# Altium PCB IOT_Masterv1.PcbDoc
Units mm, origin at the board's own origin, x right, y up, seen from the top; angles counter-clockwise.
Board outline 100 x 90 mm, 2 copper layers (Top Layer, Bottom Layer); 80 components, 84 nets, 354 pads, 50 vias.
Unrouted connection lines stored in the file: 2.
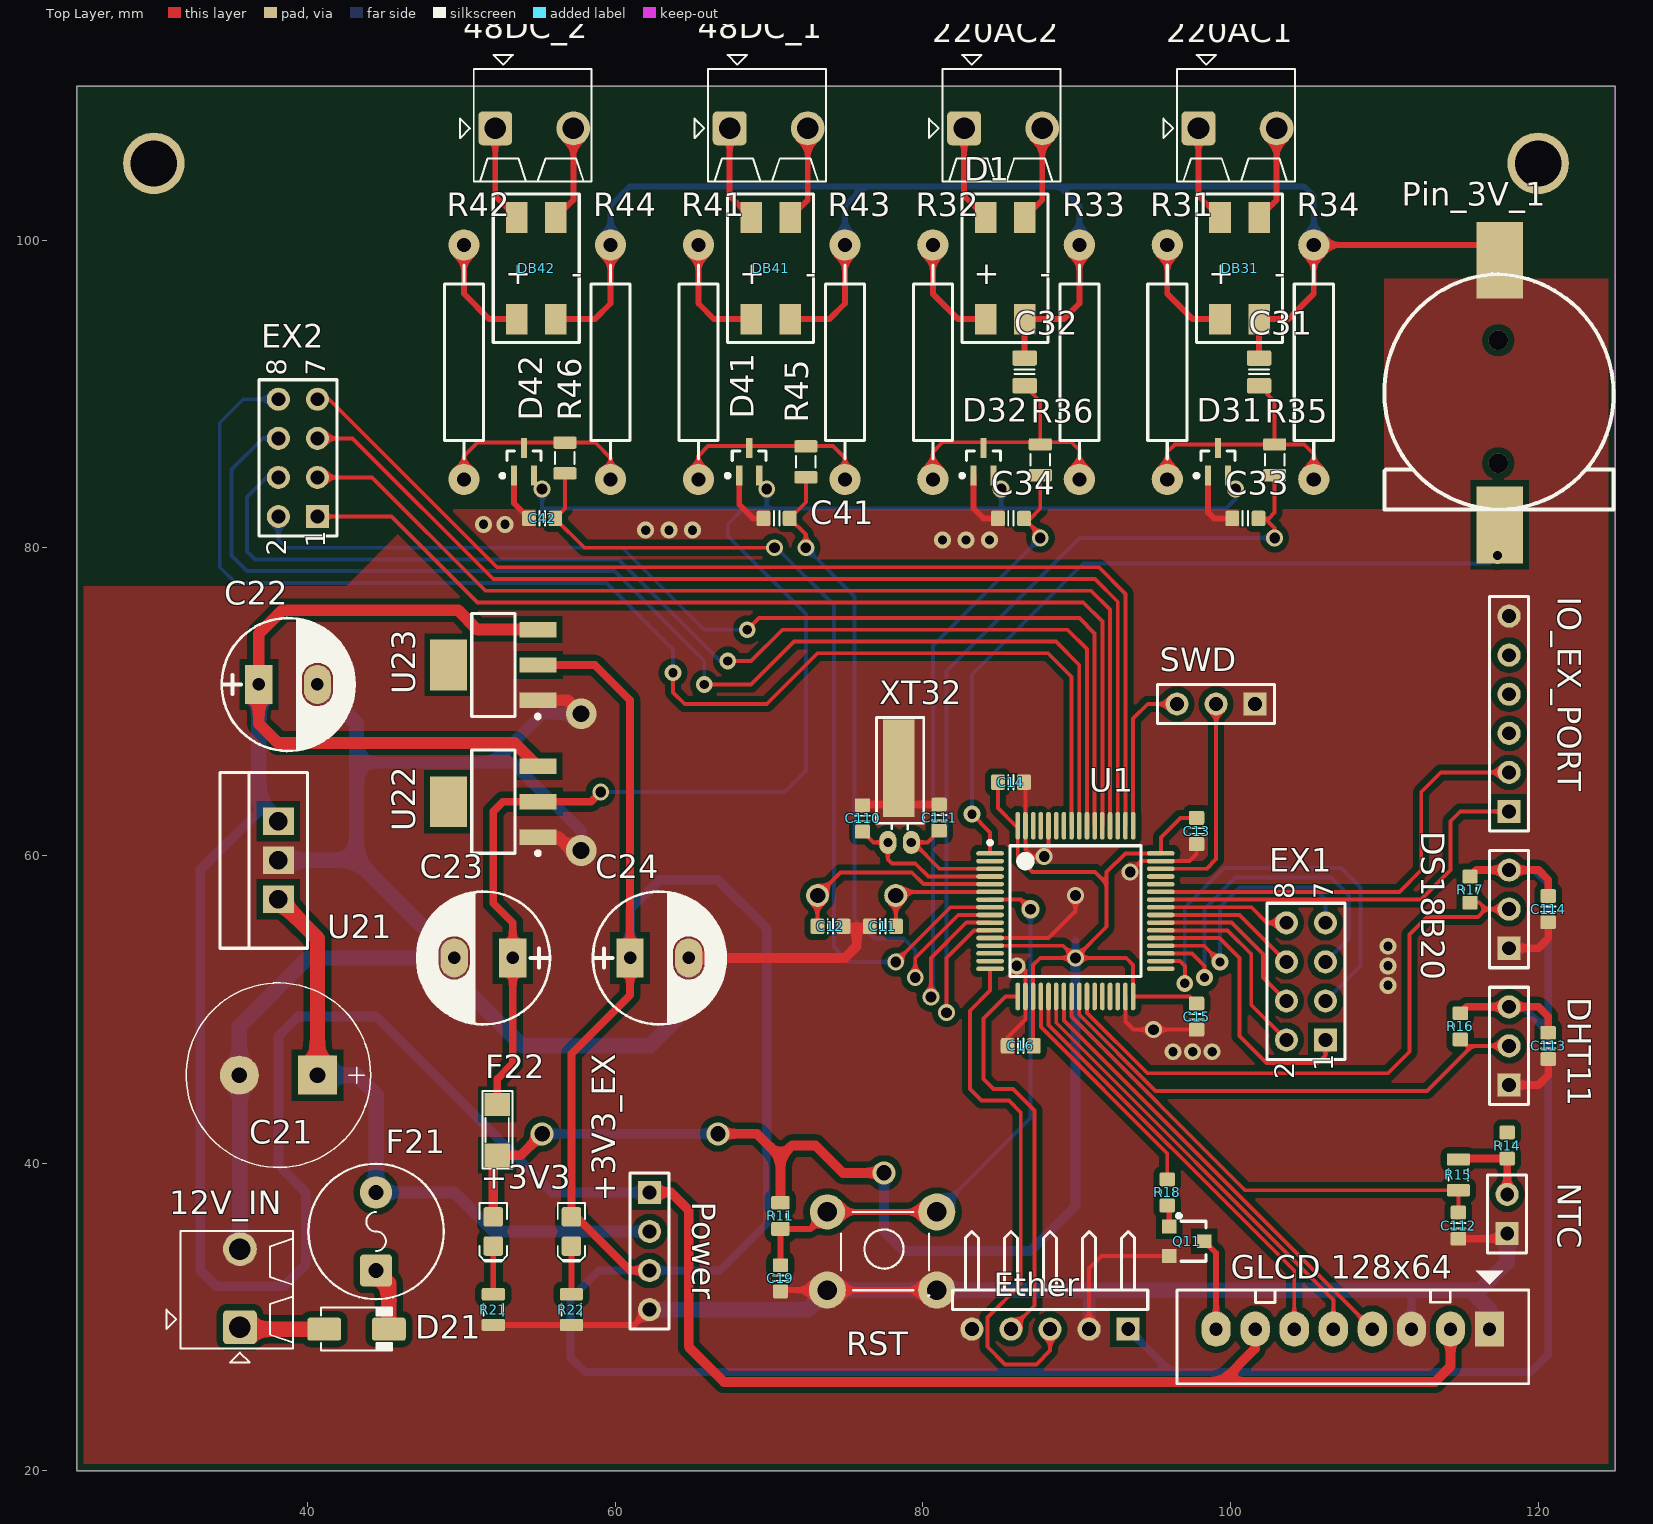
[diagram p0: Top Layer view]
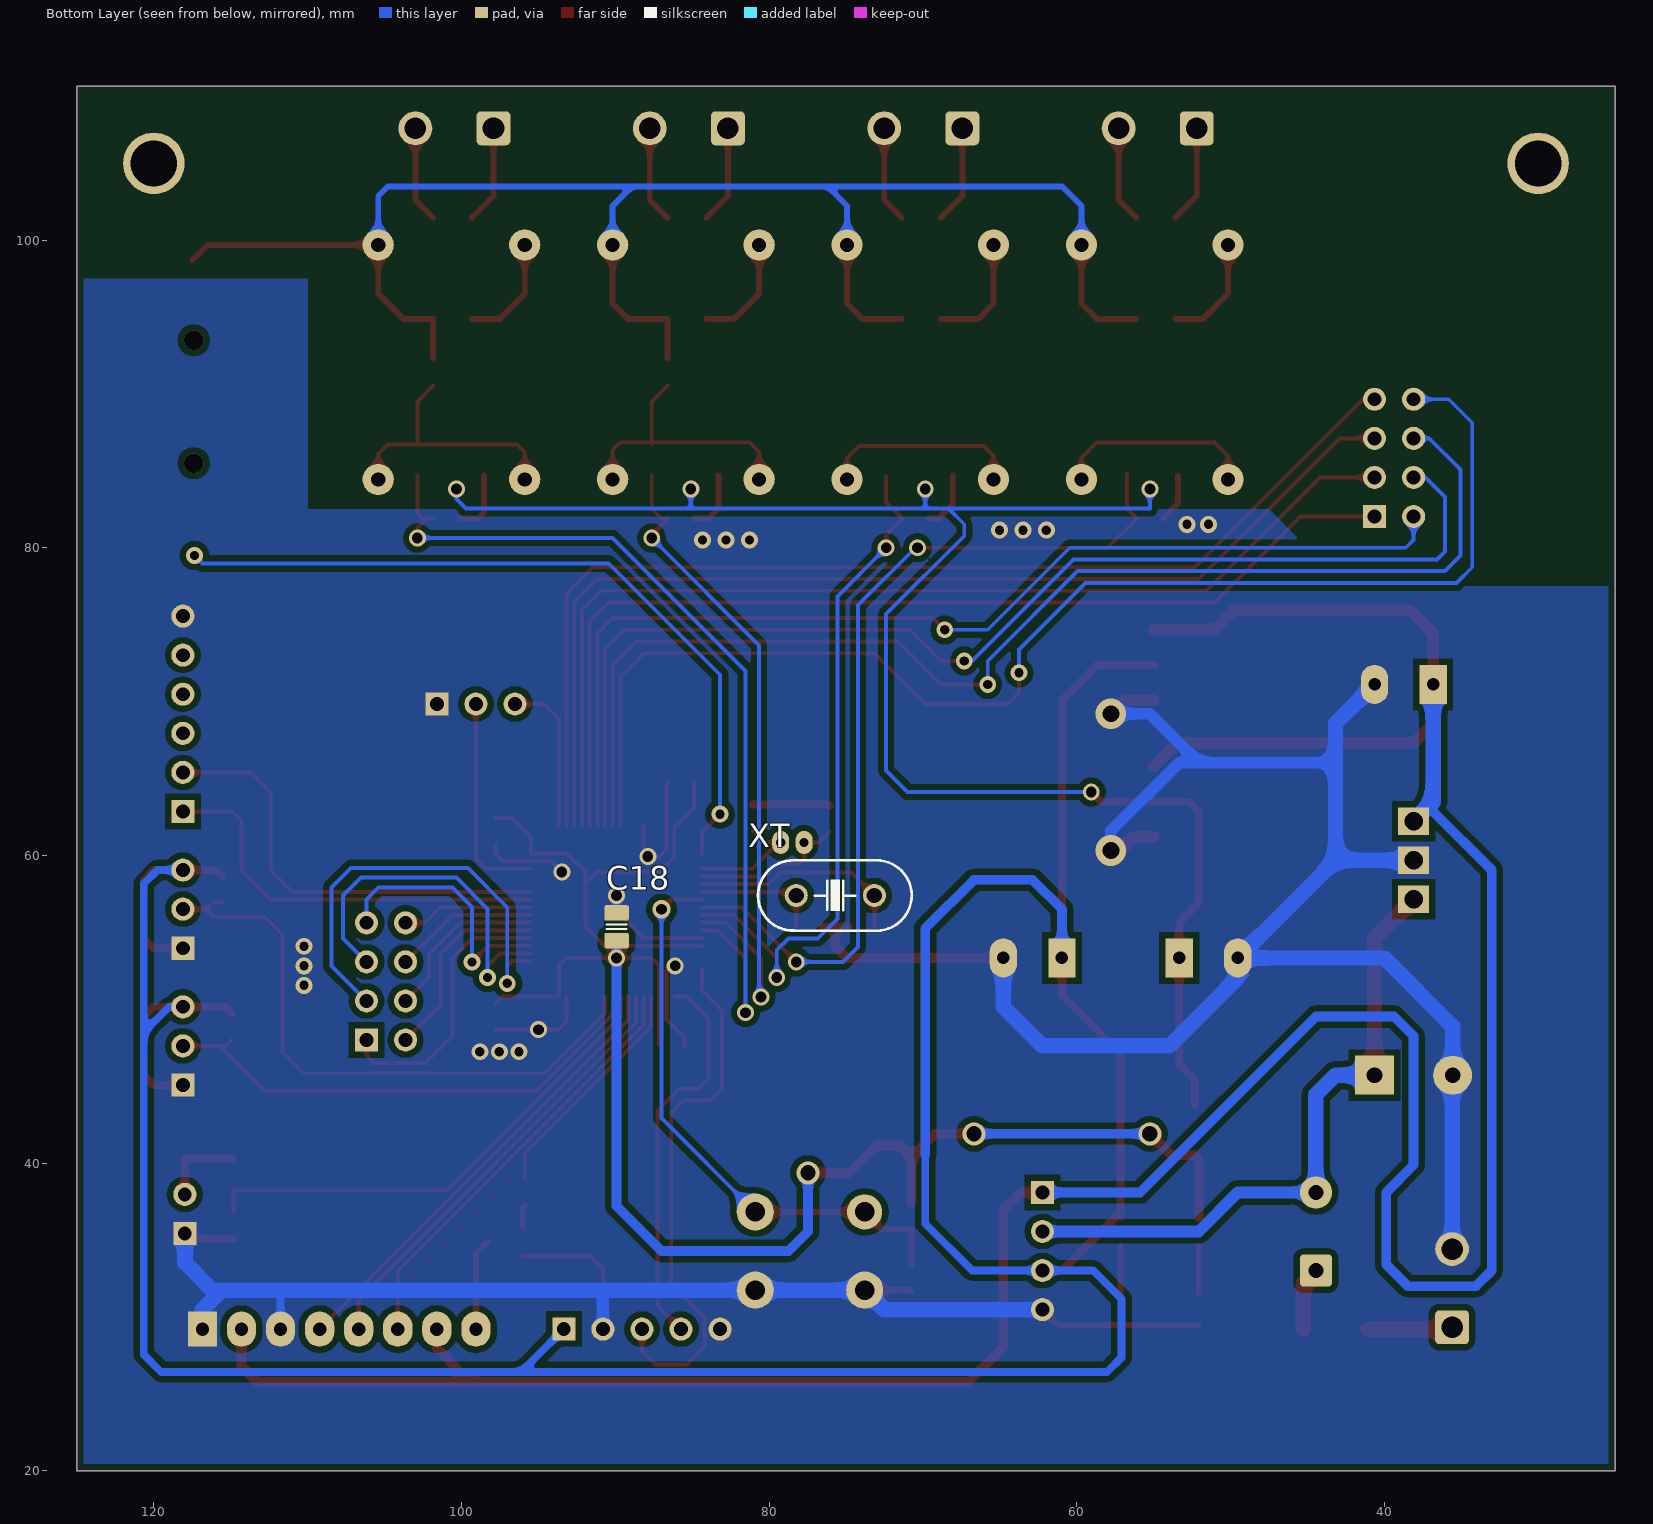
[diagram p1: Bottom Layer view, seen from below]
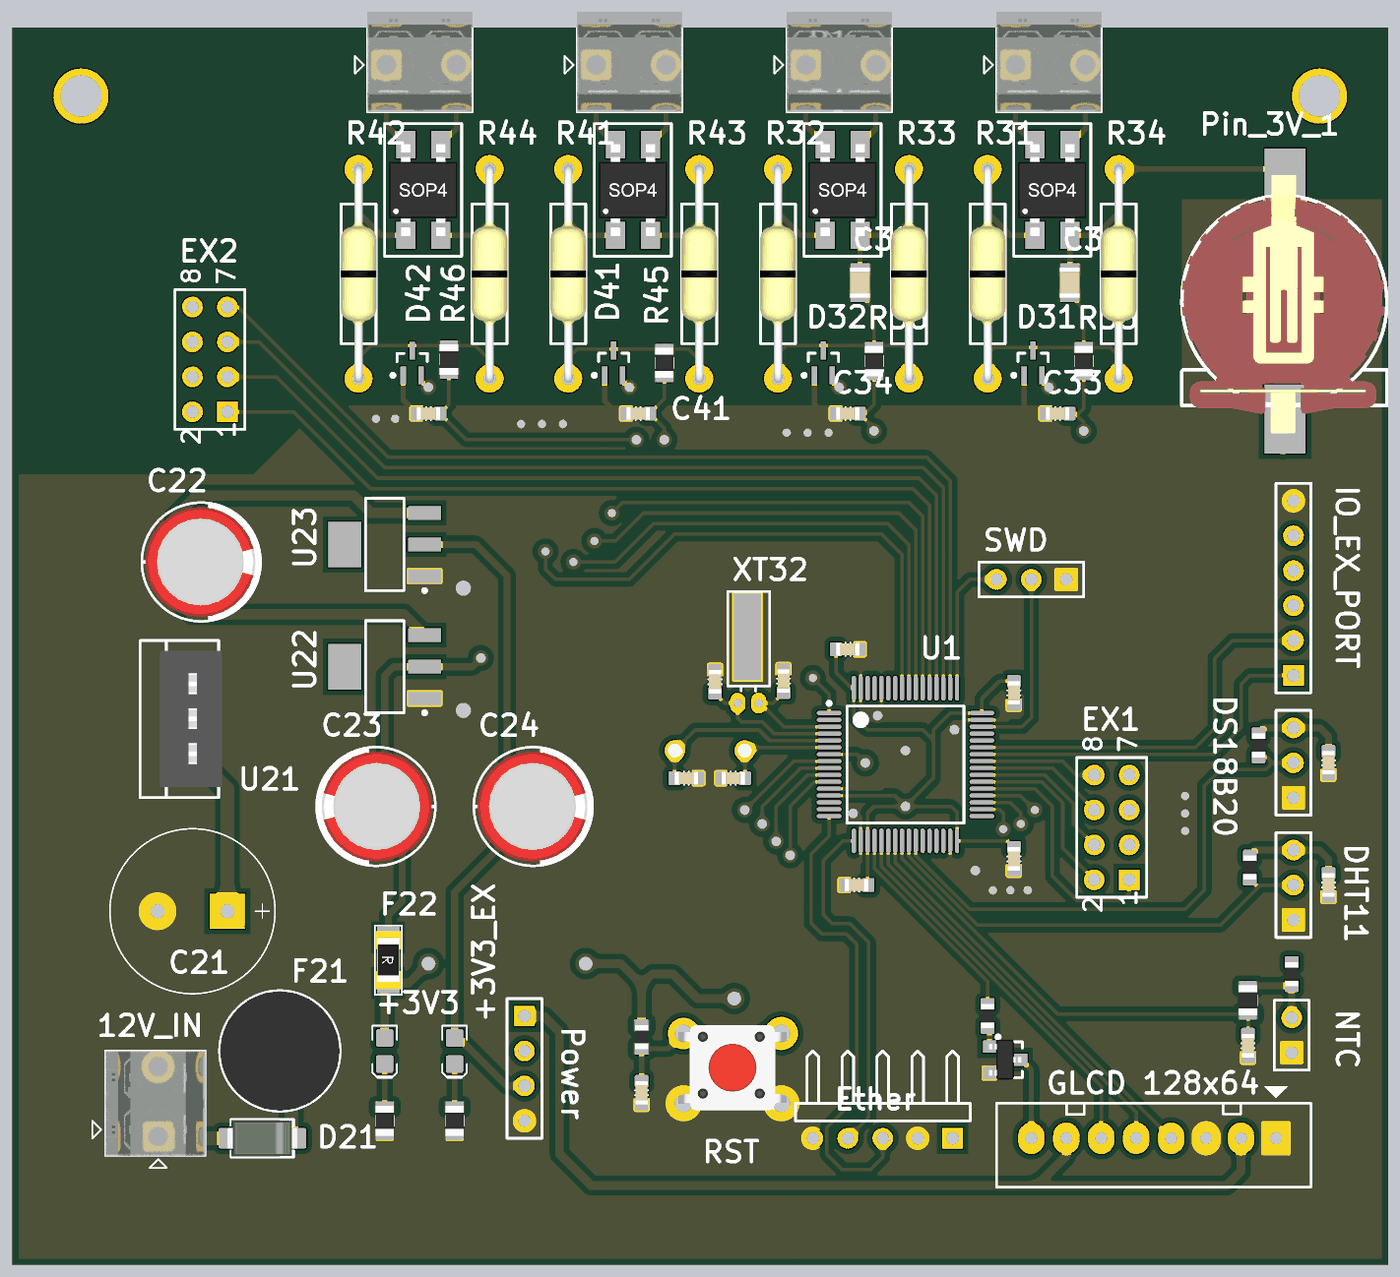
[diagram p2: 3D render of the assembled board from above, using the file's embedded part models]

## Layer stack, top to bottom
Top Solder: solder mask 0.0102, Solder Resist, Dk 3.5
Top Layer: signal copper 0.0356
Dielectric 1: dielectric 0.32, FR-4, Dk 4.8
Bottom Layer: signal copper 0.0356
Bottom Solder: solder mask 0.0102, Solder Resist, Dk 3.5

## Board outline
25,20 125,20 125,110 25,110

## Design rules (kind name [scope] priority, off if disabled: settings)
Clearance [All] p1: gap=0.4
PlaneConnect [All] p1: planeconnectstyle=Direct reliefexpansion=0.508 reliefentries=4 reliefconductorwidth=0.254 reliefairgap=0.254
PolygonConnect [All] p1: connectstyle=Direct reliefconductorwidth=0.254 reliefentries=4 polygonreliefangle="90 Angle" airgapwidth=0.254
RoutingVias [All] p1: holewidth=0.711 width=1.27 viastyle="Through Hole" minholewidth=0.6 minwidth=1.1 maxholewidth=5 maxwidth=5
SolderMaskExpansion [All] p1: expansion=0.102
Width [All] p1: maxlimit=5 minlimit=0.254 preferedwidth=0.254
29 further rules are at their usual default settings.

## Components (designator, comment, footprint, x,y, rotation, side; value= is the part's Value field where it differs from the comment)
12V_IN "Stackable ScrewTerm" 2P_PCB_ScrewTerm_200mil 31.75,27.94 r0 top
48DC_1 "Stackable ScrewTerm" 2P_PCB_ScrewTerm_200mil 66.04,111.125 r270 top
48DC_2 "Stackable ScrewTerm" 2P_PCB_ScrewTerm_200mil 50.8,111.125 r270 top
220AC1 "Stackable ScrewTerm" 2P_PCB_ScrewTerm_200mil 96.52,111.125 r270 top
220AC2 "Stackable ScrewTerm" 2P_PCB_ScrewTerm_200mil 81.28,111.125 r270 top
+3V3 "Blue" LED-0805-K 52.07,35.56 r270 top
+3V3_EX "Blue" LED-0805-K 57.15,35.56 r270 top
C11 "Cap_22p_0603" CAPC1608N 77.394,55.397 r180 top
C12 "Cap_22p_0603" CAPC1608N 73.99,55.397 r0 top
C13 "Cap_104_0603" CAPC1608N 97.79,61.595 r90 top
C14 "Cap_104_0603" CAPC1608N 85.725,64.77 r180 top
C15 "Cap_104_0603" CAPC1608N 97.79,49.53 r90 top
C16 "Cap_104_0603" CAPC1608N 86.36,47.625 r0 top
C18 "Cap_10uF_0805" CAPC2012N_F#1 89.916,55.372 r270 bottom
C19 "Cap_104_0603" CAPC1608N 70.739,32.512 r90 top
C21 "2200uF/35V" CP_1000uF_25V 38.1,45.72 r180 top
C22 "330uF/25V" CP1.5/3.4 36.83,71.12 r0 top
C23 "330uF/25V" CP1.5/3.4 53.34,53.34 r180 top
C24 "330uF/25V" CP1.5/3.4 60.96,53.34 r0 top
C31 "CAP NP" CAPC2012N_F#2 101.854,91.44 r270 top
C32 "CAP NP" CAPC2012N_F#2 86.614,91.44 r270 top
C33 "CAP NP" CAPC1608N 100.965,81.915 r0 top
C34 "CAP NP" CAPC1608N 85.725,81.915 r0 top
C41 "CAP NP" CAPC1608N 70.485,81.915 r0 top
C42 "CAP NP" CAPC1608N 55.245,81.915 r0 top
C110 "Cap_22p_0603" CAPC1608N 76.073,62.408 r90 top
C111 "Cap_22p_0603" CAPC1608N 81.051,62.459 r90 top
C112 "CAP NP" CAPC1608N 114.808,35.941 r90 top
C113 "CAP NP" CAPC1608N 120.65,47.625 r90 top
C114 "CAP NP" CAPC1608N 120.65,56.515 r90 top
D1 "Bridge" MB6S 82.55,93.345 r0 top
D21 "Diode" DO-214AC 43.18,29.21 r0 top
D31 "BAV99" SOT323 97.79,83.82 r90 top
D32 "BAV99" SOT323 82.55,83.82 r90 top
D41 "BAV99" SOT323 67.31,83.82 r90 top
D42 "BAV99" SOT323 52.665,83.813 r90 top
DB31 "Bridge" MB6S 97.79,93.345 r0 top
DB41 "Bridge" MB6S 67.31,93.345 r0 top
DB42 "Bridge" MB6S 52.07,93.345 r0 top
DHT11 "Header 3" HDR1X3 118.11,45.085 r90 top
DS18B20 "Header 3" HDR1X3 118.11,53.975 r90 top
Ether "EX_CON" HDR1X5H 93.345,29.21 r180 top
EX1 "Header 4X2" HDR2X4 106.172,48.006 r90 top
EX2 "Header 4X2" HDR2X4 40.64,82.042 r90 top
F21 "1.5A" FUSE_SR-5-BK 44.45,35.56 r90 top
F22 "fuse_200mA_1206" "SMD 1206" 52.324,42.164 r270 top
"GLCD 128x64" "JP8" CON8 116.84,29.21 r180 top
IO_EX_PORT "Header 6" HDR1X6 118.11,62.865 r90 top
NTC "NTC_10K" HDR1X2 117.983,35.433 r90 top
Pin_3V_1 "3V" CR1220 110,82.5 r0 top
Power "Header 4" HDR1X4 62.23,38.1 r270 top
Q11 "C828" "SOT23 TOP" 97.155,34.925 r270 top
R11 "Res_10k_0603" RESC1608N_F 70.739,36.576 r90 top
R14 "Res" RESC1608N_ZERO 117.983,41.148 r90 top
R15 "Res" RESC2012N_F 114.808,39.243 r270 top
R16 "Res" RESC1608N_ZERO 114.935,48.895 r90 top
R17 "Res" RESC1608N_ZERO 115.57,57.785 r90 top
R18 "Res" RESC1608N_ZERO 95.885,38.1 r270 top
R21 "Res_0805_1k" RESC2012N_F 52.07,30.48 r270 top
R22 "Res_0805_1k" RESC2012N_F 57.15,30.48 r270 top
R31 "Res" RESTH_0.0R_AXIAL-0.6 95.885,92.075 r270 top
R32 "Res" RESTH_0.0R_AXIAL-0.6 80.645,92.075 r270 top
R33 "Res" RESTH_0.0R_AXIAL-0.6 90.17,92.075 r270 top
R34 "Res" RESTH_0.0R_AXIAL-0.6 105.41,92.075 r270 top
R35 "Res" RESC2012N_F 102.87,85.725 r270 top
R36 "Res" RESC2012N_F 87.63,85.725 r270 top
R41 "Res" RESTH_0.0R_AXIAL-0.6 65.405,92.075 r270 top
R42 "Res" RESTH_0.0R_AXIAL-0.6 50.165,92.075 r270 top
R43 "Res" RESTH_0.0R_AXIAL-0.6 74.93,92.075 r270 top
R44 "Res" RESTH_0.0R_AXIAL-0.6 59.69,92.075 r270 top
R45 "Res" RESC2012N_F 72.39,85.598 r270 top
R46 "Res" RESC2012N_F 56.729,85.845 r270 top
RST "Button" SW 77.343,34.544 r0 top
SWD "Header 3" HDR1X3 101.6,69.85 r180 top
U1 "STM32F103RCT6" STM-LQFP64_N 89.916,56.388 r0 top
U21 "LM7805" TO-220 38.1,59.69 r90 top
U22 "AS1117-3V3" SOT223-4N 52.07,63.5 r180 top
U23 "AS1117-3V3" SOT223-4N 52.07,72.39 r180 top
XT "8MHz" XT2 75.692,57.403 r180 bottom
XT32 "32k" XTminiv2 77.216,60.852 r90 top

## Footprints (in the part's own frame and the unit in brackets; to place one, negate y for a bottom-side part, rotate by r counter-clockwise, add the part's x,y. Pads: shape width x height; smd on the part's side, far side on the other; paste and mask are expansions set on the pad)
2P_PCB_ScrewTerm_200mil [mm]
  rrect25% 2.2x2.2 hole 1.4: 1(3.85,1.397)
  round 2.2 hole 1.4: 2(3.85,6.477)
  silkscreen extent -0.93,-0.89 7.3,7.66, body extent 0,0 7.3,7.62, height 8.5
CAPC1608N [mm] "Chip Capacitor, Body 1.6x0.8mm, 0603, IPC Medium Density"
  round 0.254 on Mech14: 0(0,0)
  rrect25% 0.9x1 smd: 1(-0.85,0) 2(0.85,0)
  Top Layer pour cut-out: -0.4,0.6 0.4,0.6 0.4,-0.6 -0.4,-0.6
  silkscreen extent -0.18,-0.48 0.18,0.48, body extent -0.85,-0.45 0.85,0.45, height 0.89
CAPC2012N_F#1 [mm] "Chip Capacitor, Body 2.0x1.2mm, 0805, IPC Medium Density, for Flex circuits"
  round 0.254 on Mech14: 0(0,0)
  rrect25% 1.2x1.4 on Bottom Solder: 1(-0.9,0) 1(0.9,0)
  rrect25% 1x1.6 smd paste-1: 1(-0.9,0) 2(0.9,0)
  rrect25% 1x1.4 on Bottom Paste: 1(-0.9,0) 1(0.9,0)
  Top Layer pour cut-out: -0.4,0.8 0.4,0.8 0.4,-0.8 -0.4,-0.8
  silkscreen extent -0.15,-0.65 0.15,0.65, body extent -1.1,-0.72 1.1,0.73, height 1.34
CAPC2012N_F#2 [mm] "Chip Capacitor, Body 2.0x1.2mm, 0805, IPC Medium Density, for Flex circuits"
  round 0.254 on Mech14: 0(0,0)
  rrect25% 1.2x1.4 on Top Solder: 1(-0.9,0) 1(0.9,0)
  rrect25% 1x1.6 smd paste-1: 1(-0.9,0) 2(0.9,0)
  rrect25% 1x1.4 on Top Paste: 1(-0.9,0) 1(0.9,0)
  Top Layer pour cut-out: -0.4,0.8 0.4,0.8 0.4,-0.8 -0.4,-0.8
  silkscreen extent -0.15,-0.65 0.15,0.65, body extent -1.1,-0.72 1.1,0.73, height 1.34
CON8 [mil] "CON8"
  rect 75x90 hole 34: 1(0,0)
  oval 75x90 hole 34: 2(100,0) 3(200,0) 4(300,0) 5(400,0) 6(500,0) 7(600,0) 8(700,0)
  silkscreen extent -100,-150 800,140
CP1.5/3.4 [mil] "Tu hoa 220->470uF,16V, 470uF/16V,25V"
  rect 70x100 hole 32: 1(0,0)
  oval 70x100 hole 32: 2(150,0)
  silkscreen extent -95,-170 245,170, body extent -85,-157 230,157, height 446
CP_1000uF_25V [mil]
  rect 100x100 hole 40: 1(-100,0)
  round 100 hole 40: 2(100,0)
  silkscreen extent -236,-236 236,236, body extent -236,-236 237,236, height 791
CR1220 [mm]
  rect 3x5 smd: 1(7.5,-1) 2(7.5,16.2)
  silkscreen extent 0,0 14.9,15.3, body extent -0.02,-2.04 14.73,16.76, height 4.23
DO-214AC [mm] "JEDEC DO214 variation AC. SMA"
  round 0.508 on Mech14: 0(0,0)
  rrect25% 2.2x1.5 smd: A(-2.1,0) K(2.1,0)
  silkscreen extent -2.3,-1.4 2.3,1.4, body extent -2.6,-1.3 2.6,1.3, height 2.42
FUSE_SR-5-BK [mm]
  round 0.5 on Mech14: 0(0,0)
  rrect25% 2.1x2.1 hole 0.965: 1(-2.54,0)
  round 2.1 hole 0.965: 2(2.54,0)
  silkscreen extent -4.4,-4.4 4.4,4.4, body extent -4.35,-4.32 4.35,4.32, height 8.29
HDR1X2 [mm] "Connector; Header; 2 Position"
  rect 1.5x1.5 hole 0.9: 1(0,0)
  round 1.5 hole 0.9: 2(2.54,0)
  silkscreen extent -1.27,-1.27 3.81,1.27, body extent -1.27,-1.27 3.81,1.27, height 7
HDR1X3 [mm] "Connector; Header; 3 Position"
  rect 1.5x1.5 hole 0.9: 1(0,0)
  round 1.5 hole 0.9: 2(2.54,0) 3(5.08,0)
  silkscreen extent -1.27,-1.27 6.35,1.27, body extent -1.27,-1.27 6.35,1.27, height 7
HDR1X4 [mm] "Connector; Header; 4 Position"
  rect 1.5x1.5 hole 0.9: 1(0,0)
  round 1.5 hole 0.9: 2(2.54,0) 3(5.08,0) 4(7.62,0)
  silkscreen extent -1.27,-1.27 8.89,1.27, body extent -1.27,-1.27 8.89,1.27, height 7
HDR1X5H [mm] "Connector; Header; 5 Position; Right Angle"
  rect 1.5x1.5 hole 0.9: 1(0,0)
  round 1.5 hole 0.9: 2(2.54,0) 3(5.08,0) 4(7.62,0) 5(10.16,0)
  silkscreen extent -1.27,-6.35 11.43,-1.27
HDR1X6 [mm] "Connector; Header; 6 Position"
  rect 1.5x1.5 hole 0.9: 1(0,0)
  round 1.5 hole 0.9: 2(2.54,0) 3(5.08,0) 4(7.62,0) 5(10.16,0) 6(12.7,0)
  silkscreen extent -1.27,-1.27 13.97,1.27, body extent -1.27,-1.27 13.97,1.27, height 7
HDR2X4 [mm] "Connector; Header; 4x2 Position"
  rect 1.5x1.5 hole 0.9: 1(0,0)
  round 1.5 hole 0.9: 2(0,2.54) 3(2.54,0) 4(2.54,2.54) 5(5.08,0) 6(5.08,2.54) 7(7.62,0) 8(7.62,2.54)
  silkscreen extent -1.27,-1.27 8.89,3.81, body extent -1.27,-1.27 8.89,3.81, height 7
LED-0805-K [mil]
  round 20 on Mech14: 0(0,0)
  rrect25% 50x50 smd: A(-37.5,0) K(37.5,0)
  Top Layer pour cut-out: -15,30 15,30 15,-30 -15,-30
  silkscreen extent -72,-35 77,35, body extent -39,-25 39,25, height 31
MB6S [mm] "Surface mount diode bridge"
  rect 1.4x2 smd: 1(1.524,1.524) 2(1.524,8.128) 3(4.064,8.128) 4(4.064,1.524)
  silkscreen extent 0,0 5.59,9.65, body extent 0.32,1.48 5.27,8.17, height 2.9
RESC1608N_F [mm] "Chip Resistor, Body 1.6x0.8mm, 0603, IPC Medium Density, for Flex circuits"
  round 0.254 on Mech14: 0(0,0)
  rrect25% 1.1x1 on Top Solder: 1(-0.85,0) 1(0.85,0)
  rrect25% 0.9x1.2 smd paste-1: 1(-0.85,0) 2(0.85,0)
  rrect25% 0.9x1 on Top Paste: 1(-0.85,0) 1(0.85,0)
  Top Layer pour cut-out: -0.4,0.6 0.4,0.6 0.4,-0.6 -0.4,-0.6
  silkscreen extent -0.15,-0.41 0.15,0.41, body extent -0.87,-0.47 0.88,0.48, height 0.54
RESC1608N_ZERO [mm] "Chip Resistor, Body 1.6x0.8mm, 0603, IPC Medium Density"
  round 0.254 on Mech14: 0(0,0)
  rrect25% 0.9x1 smd: 1(-0.85,0) 2(0.85,0)
  Top Layer pour cut-out: -0.4,0.6 0.4,0.6 0.4,-0.6 -0.4,-0.6
  silkscreen extent -0.15,-0.41 0.15,0.41, body extent -0.87,-0.47 0.88,0.48, height 0.54
RESC2012N_F [mm] "Chip Resistor, Body 2.0x1.2mm, 0805, IPC Medium Density"
  round 0.254 on Mech14: 0(0,0)
  rrect25% 1x1.3 on Top Solder: 1(-1,0) 1(1,0)
  rrect25% 0.8x1.5 smd paste-1: 1(-1,0) 2(1,0)
  rrect25% 0.8x1.3 on Top Paste: 1(-1,0) 1(1,0)
  Top Layer pour cut-out: -0.6,0.75 0.6,0.75 0.6,-0.75 -0.6,-0.75
  silkscreen extent -0.38,-0.64 0.38,0.64, body extent -1.1,-0.67 1.1,0.68, height 0.69
RESTH_0.0R_AXIAL-0.6 [mil] "Axial Resistor 0 Ohm, Thru-Hole; 2 Leads; 0.6 in Pin Spacing"
  round 80 hole 36: 1(-300,0) 2(300,0)
  silkscreen extent -248,-50 248,50, body extent -312,-52 312,52, height 103
"SMD 1206" [mil]
  rect 60x65 smd: 1(-65,0) 2(65,0)
  silkscreen extent -99,-38 99,39, body extent -83,-35 83,36, height 25
"SOT23 TOP" [mm]
  rect 0.9x0.95 smd: 1(-0.965,-1.143) 2(0,1.143) 3(0.965,-1.143)
  silkscreen extent -1.77,-0.63 1.3,1.25, body extent -1.46,-1.17 1.46,1.17, height 1
SOT223-4N [mm]
  rect 2.4x1 smd: 1(-2.9,2.3) 2(-2.9,0) 3(-2.9,-2.3)
  rect 2.4x3.3 smd: 4(2.9,0)
  silkscreen extent -3.03,-3.35 1.4,3.47, body extent -1.85,-3.35 1.85,3.35, height 1.8
SOT323 [mm] "BAV99W"
  rect 1.3x0.4 smd: 1(0.878,-0.747) 2(0.878,-2.047) 3(2.678,-1.397)
  silkscreen extent 0.75,-2.5 2.48,0.13, body extent 1.08,-2.5 2.48,-0.3, height 1.1
STM-LQFP64_N [mm] "Thin QFP, 64-Leads, Body 10x10mm, Pitch 0.5mm, IPC Medium Density"
  oval 1.8x0.3 smd: 1(-5.55,3.75) 2(-5.55,3.25) 3(-5.55,2.75) 4(-5.55,2.25) 5(-5.55,1.75) 6(-5.55,1.25) 7(-5.55,0.75) 8(-5.55,0.25) 9(-5.55,-0.25) 10(-5.55,-0.75) 11(-5.55,-1.25) 12(-5.55,-1.75) 13(-5.55,-2.25) 14(-5.55,-2.75) 15(-5.55,-3.25) 16(-5.55,-3.75) 33(5.55,-3.75) 34(5.55,-3.25) 35(5.55,-2.75) 36(5.55,-2.25) 37(5.55,-1.75) 38(5.55,-1.25) 39(5.55,-0.75) 40(5.55,-0.25) 41(5.55,0.25) 42(5.55,0.75) 43(5.55,1.25) 44(5.55,1.75) 45(5.55,2.25) 46(5.55,2.75) 47(5.55,3.25) 48(5.55,3.75)
  oval 0.3x1.8 smd: 17(-3.75,-5.55) 18(-3.25,-5.55) 19(-2.75,-5.55) 20(-2.25,-5.55) 21(-1.75,-5.55) 22(-1.25,-5.55) 23(-0.75,-5.55) 24(-0.25,-5.55) 25(0.25,-5.55) 26(0.75,-5.55) 27(1.25,-5.55) 28(1.75,-5.55) 29(2.25,-5.55) 30(2.75,-5.55) 31(3.25,-5.55) 32(3.75,-5.55) 49(3.75,5.55) 50(3.25,5.55) 51(2.75,5.55) 52(2.25,5.55) 53(1.75,5.55) 54(1.25,5.55) 55(0.75,5.55) 56(0.25,5.55) 57(-0.25,5.55) 58(-0.75,5.55) 59(-1.25,5.55) 60(-1.75,5.55) 61(-2.25,5.55) 62(-2.75,5.55) 63(-3.25,5.55) 64(-3.75,5.55)
  silkscreen extent -5.67,-4.25 4.25,4.57, body extent -5,-5 5,5, height 1.6
SW [mil] "6.25x6.25mm"
  round 90 hole 50: 1(-140,90)
  round 95 hole 50: 1(140,90) 2(-140,-110) 2(140,-110)
  silkscreen extent -105,-125 120,90, body extent -156,-130 156,114, height 276
TO-220 [mm]
  rect 1.8x2 hole 1.2: 1(-2.54,0) 2(0,0) 3(2.54,0)
  silkscreen extent -5.71,-1.91 5.71,3.81, body extent -4.92,-2.13 4.98,2.37, height 8.08
XT2 [mm]
  round 1.5 hole 1: 1(-2.54,0) 2(2.54,0)
  silkscreen extent -5.03,-2.29 4.96,2.29, body extent -5.93,-2.36 5.42,2.29, height 3.5
XTminiv2 [mm]
  oval 1.5x1.1 hole 0.6 unplated: 1(0,-2.032) 2(0,-0.508)
  rect 6.35x2.032 smd: 3(4.826,-1.219)
  silkscreen extent 0.86,-2.84 8.13,0.23

## Part data
12V_IN 48DC_1 48DC_2 220AC1 220AC2: library part 2P_ScrewTerm_90S_3.81MM, "Terminal Block Screw Type THT 2-Position 3.81mm pitch"
+3V3 +3V3_EX: library part LED_SMD_Blue_0805_100mcd, "LED 0805 SMD Blue 100mcd 470nm"
C11 C12 C13 C14 C15 C16 C18 C19 C110 C111: library part "CAP NP"
C21 C22 C23 C24: library part CP4, "Cap 1000uF/16V - 220uF/50V"
D1 DB31 DB41 DB42: library part Bridge1, "Full Wave Diode Bridge"
D31 D32 D41 D42: library part BAV99W
DHT11 DS18B20 SWD: "Header, 3-Pin"
Ether: library part "Header 5H", "Header, 5-Pin, Right Angle"
EX1 EX2: "Header, 4-Pin, Dual row"
F21: library part Fuse
F22: library part "Fuse Thermal", "Thermal Fuse"
"GLCD 128x64": library part Con8, "Connector 8"
IO_EX_PORT: "Header, 6-Pin"
NTC: library part "Header 2", "Header, 2-Pin"
Pin_3V_1: library part Battery, "Multicell Battery"
Power: "Header, 4-Pin"
Q11: library part NPN, "Transistor C828 C1815...."
R11 R21 R22: library part Res
RST: library part "Button I"
U1: "ARM Cortex-M3 32-bit MCU, 256 KB Flash, 48 KB Internal RAM, 51 I/Os, 64-pin LQFP, -40 to 85 degC, Tray"
U21: library part LM78xx
U22 U23: library part AS1117
XT XT32: library part Crystal

## Free pads (board coordinates)
  round 4 hole 3: 2(120,105) 3(30,105)

## Via types
v1: diameter 1.1, hole 0.6, Top Layer to Bottom Layer, tented both sides, 23 vias
v2: diameter 1.1, hole 0.7, Top Layer to Bottom Layer, tented both sides, 19 vias
v3: diameter 1.5, hole 1, Top Layer to Bottom Layer, tented both sides, 3 vias
v4: diameter 2, hole 1.1, Top Layer to Bottom Layer, tented both sides, 2 vias
v5: diameter 1.27, hole 1.27, Top Layer to Bottom Layer, 2 vias
v6: diameter 1.2, hole 0.7, Top Layer to Bottom Layer, tented both sides, 1 vias

## Nets (pads, with @x,y where several pads share a name; then routed paths per layer and width w, separated by ;. In a path a pad name is that pad's centre, name@x,y a point inside that pad or via, vN(x,y) a via of type N, cw(c..) or ccw(c..) an arc to the next point about the centre after c; other vN are vias at no path point)
+3V3: C23.1 D31.2 D32.2 D41.2 D42.2 F22.1 U22.2 | length 110.8
  Top Layer w0.508: F22.1 52.324,45.466 53.34,46.482 C23.1 53.34,55.626 52.07,56.896 52.07,62.865 52.705,63.5 U22.2 58.42,63.5 v2(59.055,64.135)
  Bottom Layer w0.254: v2(55.245,83.82) 55.245,82.55 68.326,82.55 ; v2(59.055,64.135) 70.993,64.135 72.39,65.532 72.39,75.692 67.31,80.772 67.31,81.534 68.326,82.55 ; v2(69.85,83.82) 69.85,82.55 ; v2(85.09,83.82) 85.09,82.55 ; v2(100.33,83.82) 100.33,83.185 99.695,82.55 85.09,82.55 ; 68.326,82.55 69.85,82.55 ; 69.85,82.55 85.09,82.55
+3V3_EX: +3V3_EX.A C24.1 C113.2 C114.2 DHT11.3 DS18B20.3 Ether.1 Power.3 R14.2 R16.2 R17.2 U23.2 | length 219.6
  Top Layer w0.508: U23.2 58.674,72.39 60.96,70.104 C24.1 60.96,50.927 57.15,47.117 +3V3_EX.A@57.15,36.83 ; +3V3_EX.A +3V3_EX.A@57.15,36.83 ; Power.3 60.96,33.02 +3V3_EX.A@57.15,36.83 ; R16.2 115.355,50.165 DHT11.3 120.015,50.165 120.65,49.53 C113.2 ; R17.2 115.99,59.055 DS18B20.3 120.015,59.055 120.65,58.42 C114.2
  Bottom Layer w0.508: 69.85,40.513 69.85,36.068 66.802,33.02 Power.3 58.928,33.02 57.087,31.178 57.087,27.368 58.039,26.416 96.139,26.416 ; Ether.1 96.139,26.416 ; DHT11.3 118.999,50.165 120.65,48.514 ; DS18B20.3 119.761,59.055 120.65,58.166 120.65,48.514 ; 96.139,26.416 119.507,26.416 120.65,27.559 120.65,48.514
  Bottom Layer w0.635: C24.1 60.96,56.515 62.865,58.42 66.675,58.42 69.85,55.245 69.85,40.513
+5V: "GLCD 128x64.2" "GLCD 128x64.7" C22.1 Power.1 U21.3 U22.3 U23.3 | length 208.3
  Top Layer w0.635: Power.1 63.627,38.1 64.77,36.957 64.77,28.067 67.056,25.781 99.441,25.781 ; 101.6,29.21 101.6,27.94 99.441,25.781 ; 114.3,29.21 114.3,26.797 113.284,25.781 99.441,25.781
  Top Layer w0.762: U22.3 53.46,67.31 38.1,67.31 36.83,68.58 C22.1 36.83,74.422 38.354,75.946 49.784,75.946 51.04,74.69 U23.3
  Bottom Layer w0.635: 36.83,63.5 36.83,62.865 33.02,59.055 33.02,33.02 34.036,32.004 38.481,32.004 39.878,33.401 39.878,38.1 38.1,39.878 38.1,48.26 39.37,49.53 44.45,49.53 55.88,38.1 Power.1
  Bottom Layer w1: C22.1 36.83,63.5 U21.3
+12V: C21.1 F21.2 Power.2 U21.1 | length 42
  Top Layer w1: U21.1 40.64,54.61 C21.1
  Bottom Layer w0.762: F21.2 49.53,38.1 52.07,35.56 Power.2
  Bottom Layer w1: C21.1 43.18,45.72 44.45,44.45 F21.2
ADC3_IN10: C42.2 R46.2 U1.8 | length 57.8
  Top Layer w0.254: R46.2 56.729,82.549 C42.2 58,80.01 v2(70.358,80.01) ; v2(78.232,53.086) 81.784,56.638 U1.8
  Bottom Layer w0.254: v2@70.485,80.01 74.207,76.288 74.207,54.063 75.184,53.086 v2(78.232,53.086)
ADC3_IN11: C41.2 R45.2 U1.9 | length 44.8
  Top Layer w0.254: v2(72.39,80.01) 72.39,80.86 C41.2 72.39,82.97 R45.2 ; v2(79.502,52.07) 79.502,53.34 82.3,56.138 U1.9
  Bottom Layer w0.254: v2(72.39,80.01) 75.565,76.835 75.565,55.88 76.835,54.61 78.74,54.61 79.502,53.848 v2(79.502,52.07)
ADC3_IN12: C34.2 R36.2 U1.10 | length 45.3
  Top Layer w0.254: v2(80.518,50.8) 80.518,53.34 82.816,55.638 U1.10 ; v2(87.63,80.645) 87.63,80.86 C34.2 86.995,81.915 87.63,82.55 R36.2
  Bottom Layer w0.254: v2(80.518,50.8) 80.645,50.927 80.645,73.66 v2(87.63,80.645)
ADC3_IN13: C33.2 R35.2 U1.11 | length 59.4
  Top Layer w0.254: v2(81.534,49.784) 81.534,53.34 83.332,55.138 U1.11 ; C33.2 C33.2@102.235,81.915 ; v2(102.87,80.645) 102.87,81.28 C33.2@102.235,81.915 ; R35.2 102.87,82.296 102.489,81.915 C33.2@102.235,81.915
  Bottom Layer w0.254: v2(81.534,49.784) 81.534,72.009 90.17,80.645 v2(102.87,80.645)
BOOT1: U1.28
DHT11: DHT11.2 R16.1 U1.25 | length 33.3
  Top Layer w0.254: U1.25 90.166,49.661 95.123,44.704 112.776,44.704 115.697,47.625 ; R16.1 115.355,47.625 115.697,47.625 ; DHT11.2 115.697,47.625
DS18B20: DS18B20.2 R17.1 U1.26 | length 40.2
  Top Layer w0.254: U1.26 90.666,49.772 94.591,45.847 110.236,45.847 111.633,47.244 111.633,54.864 112.776,56.007 116.078,56.007 116.586,56.515 ; R17.1 116.166,56.935 116.586,56.515 ; DS18B20.2 116.586,56.515
EX_OSC_IN: C12.1 U1.5 XT.2 | length 14.2
  Top Layer w0.254: C12.1 73.14,57.391 XT.2 74.652,58.903 79.273,58.903 80.038,58.138 U1.5
EX_OSC_OUT: C11.1 U1.6 XT.1 | length 8.2
  Top Layer w0.254: XT.1 78.467,57.638 U1.6 ; C11.1 XT.1@78.244,57.391
GLCD_BL: R18.1 U1.20 | length 15.3
  Top Layer w0.254: U1.20 87.666,48.859 95.885,40.64 R18.1
GLCD_CS: "GLCD 128x64.6" U1.21 | length 28.2
  Top Layer w0.254: U1.21 88.166,48.994 104.14,33.02 104.14,29.21
GLCD_MOSI: "GLCD 128x64.5" U1.22 | length 29.1
  Top Layer w0.254: U1.22 88.666,49.129 106.68,31.115 106.68,29.21
GLCD_SCK: "GLCD 128x64.4" U1.23 | length 29.9
  Top Layer w0.254: U1.23 89.166,49.264 109.22,29.21
GND: 12V_IN.2 "GLCD 128x64.1" "GLCD 128x64.3" C11.2 C12.2 C13.1 C14.1 C15.1 C16.1 C18.1@89.916,56.272 C19.1 C21.2 C22.2 C23.2 C24.2 C31.1@101.854,92.34 C32.1@86.614,92.34 C33.1 C34.1 C41.1 C42.1 C110.2 C111.2 C112.1 C113.1 C114.1 D1.4 D31.1 D32.1 D41.1 D42.1 DB31.4 DB41.4 DB42.4 DHT11.1 DS18B20.1 Ether.2 IO_EX_PORT.6 NTC.1 Pin_3V_1.2 Power.4 Q11.3 R21.2 R22.2 R33.1 R34.1 R43.1 R44.1 RST.2 SWD.1 U1.12 U1.18 U1.31 U1.47 U1.60 U1.63 U21.2 U22.1 U23.1 | length 396.9
  Top Layer w0.254: U1.12 88.166,54.638 89.916,56.388 v2(89.916,57.404) ; C16.1 85.51,48.172 86.666,49.328 U1.18 86.666,52.526 86.36,52.832 v2(86.106,52.832) ; C14.1 86.666,64.679 U1.63 86.666,60.4 87.122,59.944 v2(87.884,59.944) 88.166,60.226 U1.60 ; Ether.2 90.805,33.147 91.618,33.96 Q11.3 ; U1.31 93.166,49.201 93.687,48.68 v2(94.996,48.68) C15.1 ; v2(93.472,58.928) 94.182,59.638 U1.47 97.318,59.638 97.79,60.11 C13.1
  Top Layer w0.381: R21.2 R22.2 61.23,29.48 Power.4 ; D42.1 53.412,82.898 C42.1 ; DB42.4 58.674,94.869 59.69,95.885 R44.1 ; D41.1 68.057,82.819 68.961,81.915 C41.1 ; C19.1 70.827,31.75 73.787,31.75 RST.2@80.899,31.75 ; DB41.4 73.914,94.869 74.93,95.885 R43.1 ; D32.1 83.297,82.565 83.947,81.915 C34.1 ; C32.1@86.614,92.34 D1.4 89.154,94.869 90.17,95.885 R33.1 ; D31.1 98.537,82.311 98.933,81.915 C33.1 ; C31.1@101.854,92.34 DB31.4 103.759,94.869 105.41,96.52 R34.1 116.505,99.695 Pin_3V_1.2
  Top Layer w0.508: C12.2 75.692,55.397 C11.2 ; C110.2 76.124,63.309 C111.2 ; C112.1 117.641,35.091 NTC.1 ; DHT11.1 120.015,45.085 120.65,45.72 C113.1 ; DS18B20.1 120.015,53.975 120.65,54.61 C114.1
  Top Layer w0.635: C24.2 74.93,53.34 75.692,54.102 75.692,55.397
  Top Layer w0.762: U22.1 56.275,61.2 57.15,60.325 v4(57.785,60.325) ; U23.1 56.91,70.09 v4(57.785,69.215)
  Bottom Layer w0.254: C18.1@89.916,56.272 v2(89.916,57.404) ; 111.76,31.496 112.014,31.75
  Bottom Layer w0.381: R44.1 59.69,102.235 60.96,103.505 88.9,103.505 ; R43.1 74.93,102.235 76.2,103.505 ; R33.1 90.17,102.235 88.9,103.505 ; R34.1 105.41,102.87 104.775,103.505 88.9,103.505
  Bottom Layer w0.508: 111.76,29.21 111.76,31.496
  Bottom Layer w0.762: 43.18,66.04 52.07,66.04 ; v4(57.785,60.325) 57.785,61.595 53.34,66.04 52.07,66.04 ; v4(57.785,69.215) 55.245,69.215 52.07,66.04
  Bottom Layer w0.8: Ether.2 90.805,31.75
  Bottom Layer w1: 12V_IN.2 35.6,45.68 C21.2 35.56,48.895 40.005,53.34 C23.2 ; U21.2 43.18,59.69 ; C22.2 43.18,68.58 43.18,66.04 43.18,59.69 ; Power.4 72.517,30.48 73.787,31.75 80.899,31.75 90.805,31.75 112.014,31.75 115.57,31.75 ; C24.2 64.77,50.165 62.23,47.625 53.975,47.625 49.53,52.07 C23.2 ; 116.84,29.21 116.84,30.48 115.57,31.75 ; NTC.1 117.983,33.528 116.205,31.75 115.57,31.75 ; 43.18,59.69 C23.2
  other v1: 96.266,47.244 97.536,47.244 98.806,47.244 110.236,51.562 110.236,52.832 110.236,54.102 81.28,80.518 82.804,80.518 84.328,80.518 61.976,81.153 63.5,81.153 65.024,81.153 51.435,81.534 52.832,81.534
IO_MISO: IO_EX_PORT.3
IO_RUN: IO_EX_PORT.4
MCU_VBAT: Pin_3V_1.1 U1.1 | length 49.7
  Top Layer w0.254: v1(83.185,62.687) 84.366,61.506 U1.1 ; v1(117.348,79.502) Pin_3V_1.1@117.5,79.654
  Bottom Layer w0.254: v1(83.185,62.687) 83.185,71.755 90.424,78.994 116.84,78.994 v1(117.348,79.502)
Net12V_IN_1: 12V_IN.1 D21.A | length 5.5
  Top Layer w1: 12V_IN.1 35.727,29.21 D21.A
Net48DC_1_1: 48DC_1.1 DB41.2 | length 6.4
  Top Layer w0.381: 48DC_1.1 67.437,102.87 DB41.2
Net48DC_1_2: 48DC_1.2 DB41.3 | length 6.3
  Top Layer w0.381: DB41.3 72.517,102.616 48DC_1.2
Net48DC_2_1: 48DC_2.1 DB42.2 | length 6.4
  Top Layer w0.381: 48DC_2.1 52.197,102.87 DB42.2
Net48DC_2_2: 48DC_2.2 DB42.3 | length 6.3
  Top Layer w0.381: DB42.3 57.277,102.616 48DC_2.2
Net220AC1_1: 220AC1.1 DB31.2 | length 6.4
  Top Layer w0.381: 220AC1.1 97.917,102.87 DB31.2
Net220AC1_2: 220AC1.2 DB31.3 | length 6.3
  Top Layer w0.381: DB31.3 102.997,102.616 220AC1.2
Net220AC2_1: 220AC2.1 D1.2 | length 6.4
  Top Layer w0.381: 220AC2.1 82.677,102.87 D1.2
Net220AC2_2: 220AC2.2 D1.3 | length 6.3
  Top Layer w0.381: D1.3 87.757,102.616 220AC2.2
Net+3V3_EX_K: +3V3_EX.K R22.1@57.15,31.48 | length 3.1
  Top Layer w0.381: R22.1@57.15,31.48 +3V3_EX.K
Net+3V3_K: +3V3.K R21.1@52.07,31.48 | length 3.1
  Top Layer w0.381: R21.1@52.07,31.48 +3V3.K
NetC31_2: C31.2 D31.3 R31.2 R34.2 R35.1@102.87,86.725 | length 17.7
  Top Layer w0.254: R31.2 95.885,86.233 96.377,86.725 R35.1@102.87,86.725 ; C31.2 102.87,89.524 R35.1@102.87,86.725 ; R34.2 105.41,86.106 104.791,86.725 R35.1@102.87,86.725
NetC32_2: C32.2 D32.3 R32.2 R33.2 R36.1@87.63,86.725 | length 17.9
  Top Layer w0.254: R32.2 80.645,86.233 81.28,86.868 R36.1@87.63,86.868 ; C32.2 87.63,89.524 R36.1@87.63,86.868 ; R36.1@87.63,86.725 R36.1@87.63,86.868 ; R33.2 90.17,86.36 89.662,86.868 R36.1@87.63,86.868
NetD1_1: D1.1 R32.1 | length 7.3
  Top Layer w0.381: R32.1 80.645,96.52 82.296,94.869 D1.1
NetD21_2: D21.K F21.1 | length 4.2
  Top Layer w1: F21.1 45.28,32.19 D21.K
NetD41_3: D41.3 R41.2 R43.2 R45.1@72.39,86.598 | length 13
  Top Layer w0.254: R41.2 65.405,85.979 66.04,86.614 74.168,86.614 74.93,85.852 R43.2
NetD42_3: D42.3 R42.2 R44.2 R46.1@56.729,86.845 | length 13.2
  Top Layer w0.254: R42.2 50.165,85.979 51.031,86.845 56.729,86.845 58.697,86.845 59.69,85.852 R44.2
NetDB31_1: DB31.1 R31.1 | length 7.3
  Top Layer w0.381: R31.1 95.885,96.52 97.536,94.869 DB31.1
NetDB41_1: DB41.1 R41.1 | length 7.7
  Top Layer w0.381: R41.1 65.405,95.885 66.421,94.869 DB41.1
NetDB42_1: DB42.1 R42.1 | length 7.3
  Top Layer w0.381: R42.1 50.165,96.52 51.816,94.869 DB42.1
"NetGLCD 128x64_8": "GLCD 128x64.8" Q11.2 | length 6
  Top Layer w0.381: Q11.2 99.06,34.163 99.06,29.21
NetNTC_2: NTC.2 R14.1 R15.1@114.808,40.243 | length 5.4
  Top Layer w0.508: R15.1@114.863,40.298 R14.1 NTC.2
NetQ11_1: Q11.1 R18.2 | length 1.4
  Top Layer w0.381: R18.2 96.012,37.123 Q11.1
NRST: C19.2 R11.1@70.739,35.726 RST.1 U1.7 | length 38.1
  Top Layer w0.254: U1.7 86.372,57.138 v6(86.995,56.515)
  Top Layer w0.381: C19.2 70.739,35.726 72.683,35.726 73.787,36.83 RST.1@80.899,36.83
  Bottom Layer w0.254: RST.1@80.899,36.83 86.995,42.926 v6(86.995,56.515)
NTC_ADC: C112.2 R15.2 U1.24 | length 32.6
  Top Layer w0.254: U1.24 89.666,49.526 100.949,38.243 R15.2 C112.2
OSC32_IN: C111.1 U1.3 XT32.1 | length 7.8
  Top Layer w0.254: XT32.1 XT32.1@79.381,60.852 ; C111.1 80.295,60.852 XT32.1@79.381,60.852 ; U1.3 81.095,59.138 XT32.1@79.381,60.852
OSC32_OUT: C110.1 U1.4 XT32.2 | length 10.2
  Top Layer w0.254: C110.1 76.779,60.852 XT32.2 77.724,59.741 77.978,59.487 79.502,59.487 80.351,58.638 U1.4
PA1: U1.15
PA8: EX1.8 U1.41 | length 8.6
  Top Layer w0.254: U1.41 101.35,56.638 102.362,55.626 EX1.8
PA11: U1.44
PA12: U1.45
PA15: EX2.7 U1.50 | length 72.8
  Top Layer w0.254: EX2.7 41.402,89.662 52.324,78.74 91.44,78.74 93.166,77.014 U1.50
PB1: U1.27
PB3: EX2.4 U1.55 | length 76.5
  Top Layer w0.254: v1(67.31,72.644) 68.834,72.644 70.866,74.676 89.408,74.676 90.666,73.418 U1.55
  Bottom Layer w0.254: EX2.4 37.338,84.582 36.068,83.312 36.068,79.756 36.576,79.248 60.198,79.248 66.802,72.644 v1(67.31,72.644)
PB4: EX2.6 U1.56 | length 81.2
  Top Layer w0.254: v1(65.786,71.12) 68.834,71.12 71.628,73.914 88.646,73.914 90.166,72.394 U1.56
  Bottom Layer w0.254: EX2.6 37.084,87.122 35.052,85.09 35.052,79.502 36.068,78.486 59.944,78.486 65.786,72.644 v1(65.786,71.12)
PB5: EX2.8 U1.57 | length 86.2
  Top Layer w0.254: v1(63.754,71.882) 63.754,70.612 64.516,69.85 69.85,69.85 73.152,73.152 88.138,73.152 89.666,71.624 U1.57
  Bottom Layer w0.254: EX2.8 35.814,89.662 34.29,88.138 34.29,78.74 35.306,77.724 59.436,77.724 63.754,73.406 v1(63.754,71.882)
PB6: U1.58
PB7: U1.59
PB8: U1.61
PB9: U1.62
PB10: U1.29
PB11: U1.30
PB12: U1.33
PB13: EX1.3 U1.34 | length 29.2
  Top Layer w0.254: U1.34 96.722,53.138 97.028,52.832 97.028,51.701 v1(97.02,51.693)
  Bottom Layer w0.254: v1@97.028,51.562 97.02,51.57 v1(97.02,51.693) 97.02,56.634 99.568,59.182 107.188,59.182 108.458,57.912 108.458,52.832 EX1.3
PB14: EX1.5 U1.35 | length 24.1
  Top Layer w0.254: U1.35 97.492,53.638 98.298,52.832 v1(98.298,52.07)
  Bottom Layer w0.254: v1(98.298,52.07) 98.298,56.534 100.33,58.566 106.534,58.566 107.696,57.404 107.696,54.61 EX1.5
PB15: EX1.7 U1.36 | length 17.3
  Top Layer w0.254: U1.36 98.262,54.138 v1(99.314,53.086)
  Bottom Layer w0.254: v1@99.568,53.086 v1(99.314,53.086) 99.314,56.642 100.584,57.912 105.41,57.912 106.172,57.15 EX1.7
PC6: EX1.1 U1.37 | length 18.3
  Top Layer w0.254: U1.37 99.286,54.638 100.584,53.34 100.584,48.26 102.343,46.501 105.683,46.501 106.172,46.99 EX1.1
PC7: EX1.2 U1.38 | length 13.1
  Top Layer w0.254: U1.38 99.802,55.138 101.346,53.594 101.346,50.292 EX1.2
PC8: EX1.4 U1.39 | length 11.2
  Top Layer w0.254: U1.39 100.064,55.638 102.108,53.594 102.108,52.07 EX1.4
PC9: EX1.6 U1.40 | length 9.4
  Top Layer w0.254: U1.40 100.58,56.138 EX1.6
PC10: EX2.5 U1.51 | length 71
  Top Layer w0.254: EX2.5 42.926,87.122 52.07,77.978 91.186,77.978 92.666,76.498 U1.51
PC11: EX2.3 U1.52 | length 69.1
  Top Layer w0.254: EX2.3 44.196,84.582 51.562,77.216 90.932,77.216 92.166,75.982 U1.52
PC12: EX2.1 U1.53 | length 67.1
  Top Layer w0.254: EX2.1 45.466,82.042 51.054,76.454 90.424,76.454 91.666,75.212 U1.53
PD2: EX2.2 U1.54 | length 70.2
  Top Layer w0.254: v1(68.58,74.676) 69.342,75.438 90.17,75.438 91.166,74.442 U1.54
  Bottom Layer w0.254: EX2.2 38.1,80.518 38.608,80.01 60.452,80.01 65.786,74.676 v1(68.58,74.676)
SWCLK: SWD.3 U1.49 | length 10.2
  Top Layer w0.254: U1.49 93.666,68.901 94.615,69.85 SWD.3
SWDIO: SWD.2 U1.46 | length 13.9
  Top Layer w0.254: U1.46 98.425,59.138 99.06,59.773 SWD.2
TAMP_PC13: U1.2
USART1_RX: IO_EX_PORT.2 U1.43 | length 28.8
  Top Layer w0.254: U1.43 110.978,57.638 112.395,59.055 112.395,64.135 113.665,65.405 IO_EX_PORT.2
USART1_TX: IO_EX_PORT.1 U1.42 | length 26.9
  Top Layer w0.254: U1.42 112.383,57.138 114.3,59.055 114.3,62.23 114.935,62.865 IO_EX_PORT.1
USART2_RX: Ether.4 U1.17 | length 25.7
  Top Layer w0.254: Ether.4 87.249,30.734 87.249,43.434 85.852,44.831 84.582,44.831 83.947,45.466 83.947,49.403 85.382,50.838 U1.17
USART2_TX: Ether.3 U1.16 | length 34.7
  Top Layer w0.254: U1.16 84.366,51.219 83.058,49.911 83.058,44.831 83.82,44.069 85.598,44.069 86.36,43.307 86.36,32.131 84.201,29.972 84.201,28.067 85.344,26.924 87.376,26.924 88.265,27.813 Ether.3
VCC: +3V3.A C13.2 C14.2 C15.2 C16.2 C18.2 F22.2 IO_EX_PORT.5 R11.2 U1.13 U1.19 U1.32 U1.48 U1.64 | length 120
  Top Layer w0.254: U1.13 89.118,54.138 v2(89.916,53.34) ; C14.2 84.875,63.08 86.017,61.938 U1.64 86.166,59.884 87.122,58.928 91.186,58.928 91.948,58.166 ; C16.2@87.166,47.669 U1.19 87.166,52.876 87.63,53.34 v2(89.916,53.34) ; C15.2 97.332,50.838 U1.32 93.666,52.892 93.218,53.34 v2(89.916,53.34) ; C13.2 96.735,62.445 95.466,61.176 U1.48 93.158,60.138 91.948,58.928 91.948,58.166 ; v2(89.916,53.34) 91.948,55.372 91.948,58.166
  Top Layer w0.635: +3V3.A F22.2@52.07,40.259 ; F22.2 53.848,40.513 v3(55.245,41.91) ; v3(66.675,41.91) 69.215,41.91 70.739,40.386 ; R11.2 70.739,40.386 ; v3(77.47,39.37) 74.803,39.37 73.025,41.148 71.501,41.148 70.739,40.386
  Bottom Layer w0.5: v2(89.916,53.34) C18.2
  Bottom Layer w0.635: v3(55.245,41.91) v3(66.675,41.91) ; v3(77.47,39.37) 77.47,35.56 78.74,34.29 86.995,34.29 89.916,37.211 v2(89.916,53.34)
WKUP_PA0: U1.14
pads on no net: +3V3.0 +3V3_EX.0 C11.0 C12.0 C13.0 C14.0 C15.0 C16.0 C18.0 C18.1@89.916,54.472 C18.1@89.916,56.272 C19.0 C31.0 C31.1@101.854,90.54 C31.1@101.854,92.34 C32.0 C32.1@86.614,90.54 C32.1@86.614,92.34 C33.0 C34.0 C41.0 C42.0 C110.0 C111.0 C112.0 C113.0 C114.0 D21.0 Ether.5 F21.0 R11.0 R11.1@70.739,35.726 R11.1@70.739,37.426 R14.0 R15.0 R15.1@114.808,38.243 R15.1@114.808,40.243 R16.0 R17.0 R18.0 R21.0 R21.1@52.07,29.48 R21.1@52.07,31.48 R22.0 R22.1@57.15,29.48 R22.1@57.15,31.48 R35.0 R35.1@102.87,84.725 R35.1@102.87,86.725 R36.0 R36.1@87.63,84.725 R36.1@87.63,86.725 R45.0 R45.1@72.39,84.598 R45.1@72.39,86.598 R46.0 R46.1@56.729,84.845 R46.1@56.729,86.845 U22.4 U23.4 XT32.3
copper on no net:
  other v5: 117.4,85.5 117.4,93.5

## Polygon pours and split planes (outlines as drawn)
GND on Bottom Layer "Bottom Layer-No Net" (solid, pour order 4): 125,97.5 110,97.5 110,82.5 47.5,82.5 45,80 42.5,77.5 40,77.5 25,77.5 25,20 125,20
GND on Top Layer "Bottom Layer-No Net" (solid, pour order 6): 125,97.5 110,97.5 110,82.5 47.5,82.5 42.5,77.5 25,77.5 25,20 125,20

## Keep-outs
Keep-Out Layer:
  the board outline again, w0.1

## Text inside footprints (layer, text, board x,y; h text height)
D1: Top Overlay "+    -" at 83.312,96.647 h2.5
DB31: Top Overlay "+    -" at 98.552,96.647 h2.5
DB41: Top Overlay "+    -" at 68.072,96.647 h2.5
DB42: Top Overlay "+    -" at 52.832,96.647 h2.5
EX1: Top Overlay "8" at 104.14,57.15 h1.27 r90; Top Overlay "7" at 106.68,57.15 h1.27 r90; Top Overlay "1" at 106.68,45.974 h1.27 r90; Top Overlay "2" at 104.14,45.466 h1.27 r90
EX2: Top Overlay "8" at 38.608,91.186 h1.27 r90; Top Overlay "7" at 41.148,91.186 h1.27 r90; Top Overlay "1" at 41.148,80.01 h1.27 r90; Top Overlay "2" at 38.608,79.502 h1.27 r90